# Altium PCB 20K Control Board V1.1.PcbDoc (part 7 of 24)
Units mm, origin at the board's own origin, x right, y up, seen from the top; angles counter-clockwise.
Board outline 132 x 260 mm, 4 copper layers (Top Layer, GND, VCC, Bottom Layer); 1384 components, 779 nets, 4515 pads, 1774 vias.
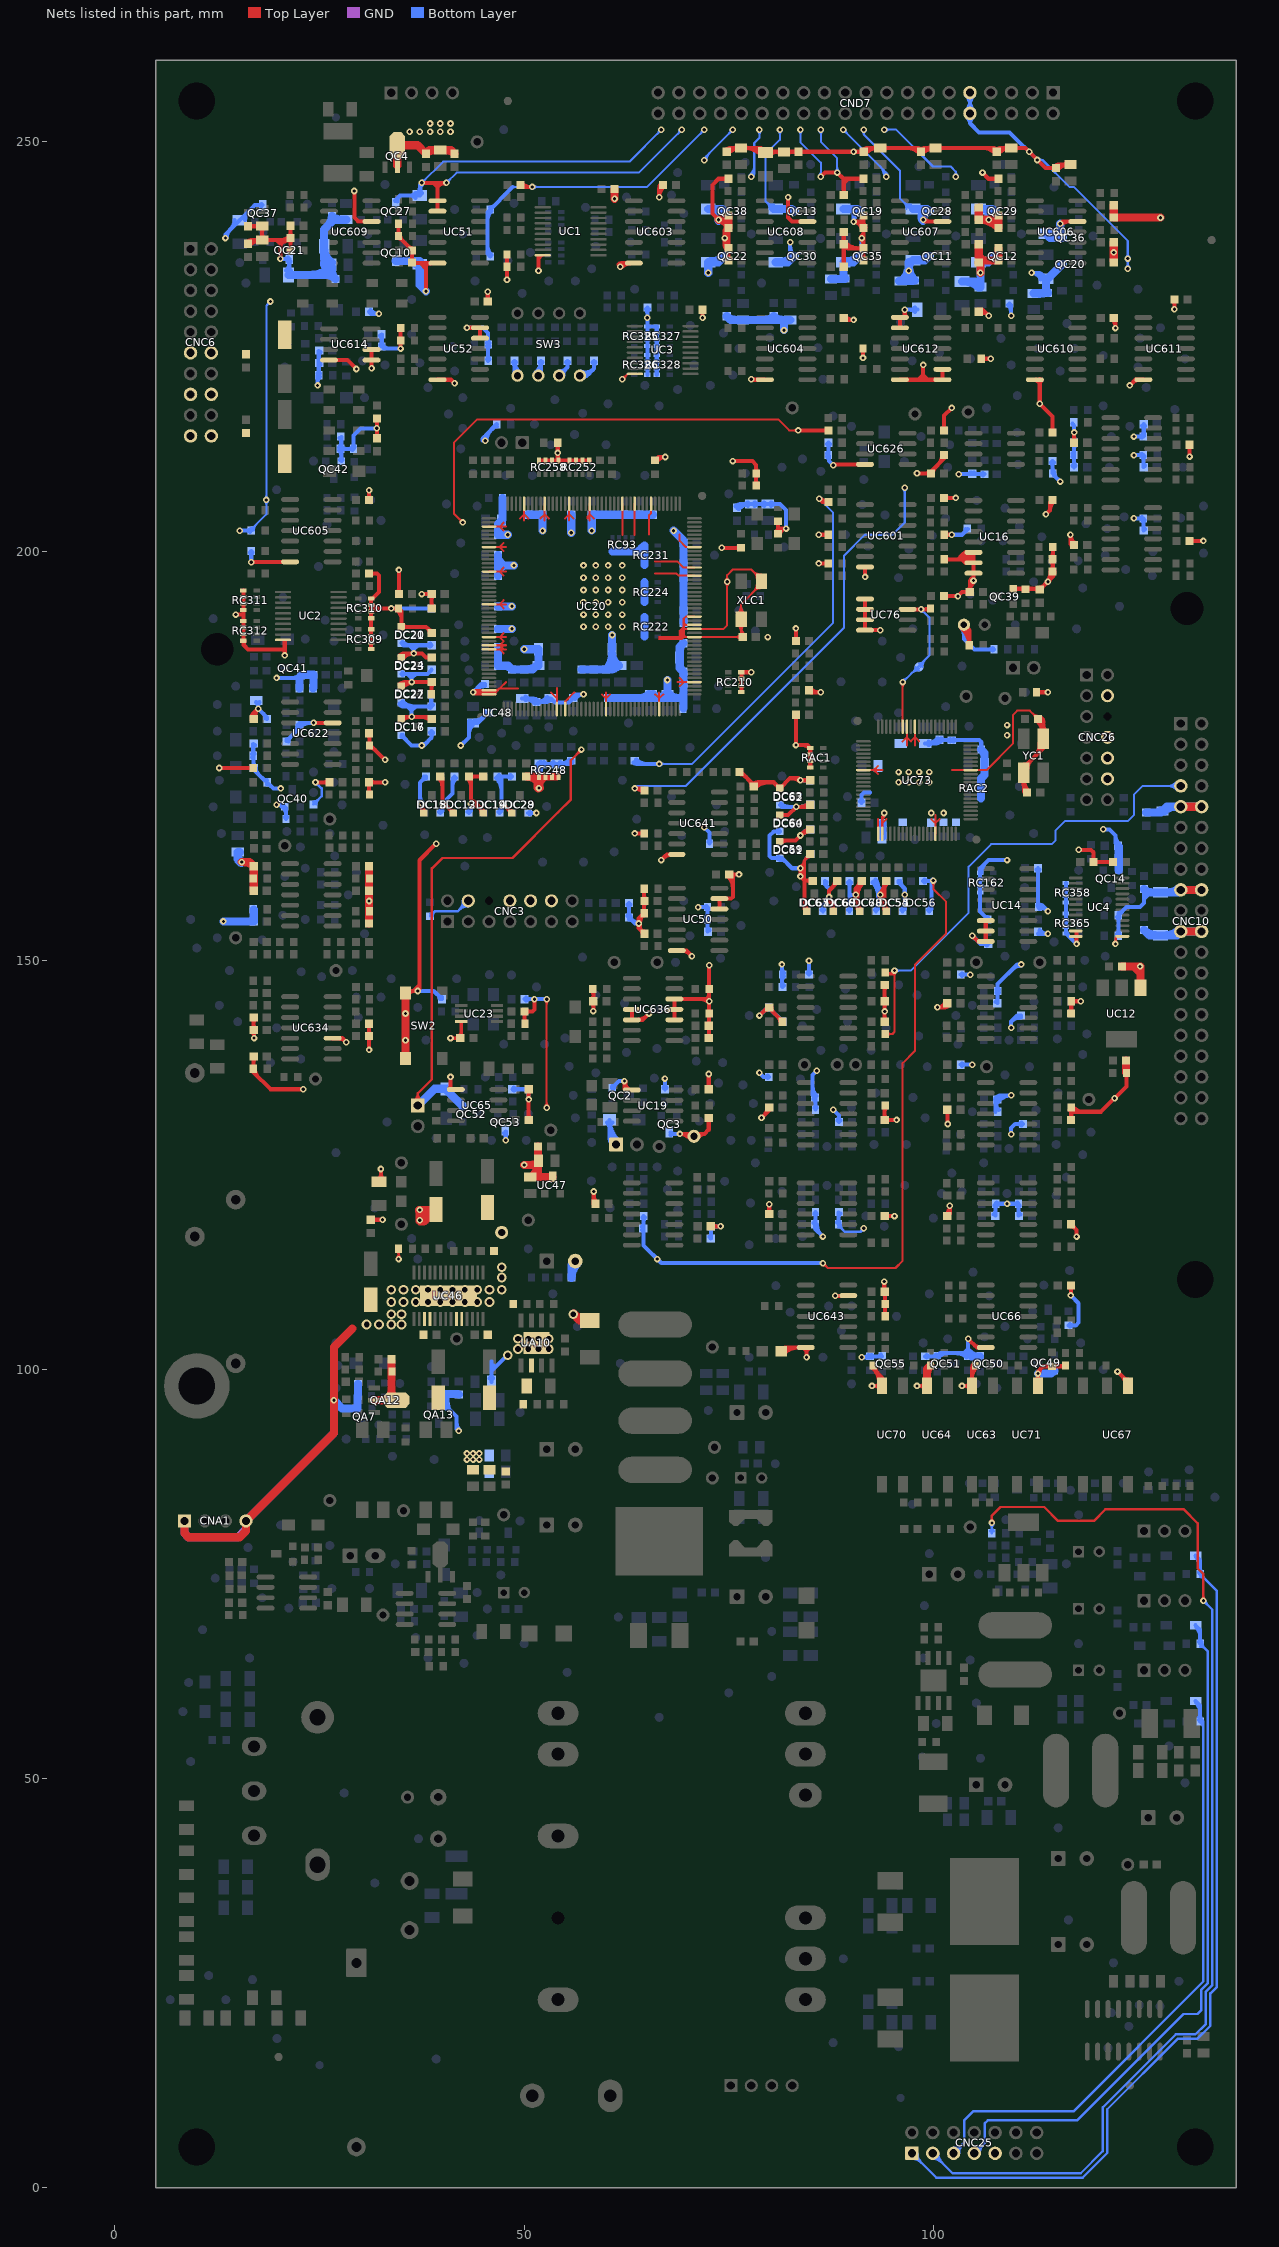
[diagram p9: the nets of this part, all layers, seen from the top]

## Via types
v1: diameter 0.8, hole 0.4, Top Layer to Bottom Layer, tented both sides, 1354 vias
v2: diameter 1.2, hole 0.7, Top Layer to Bottom Layer, 261 vias
v3: diameter 0.8, hole 0.4, Top Layer to Bottom Layer, 58 vias
v4: diameter 1.2, hole 0.7, Top Layer to Bottom Layer, tented top, 58 vias
v5: diameter 0.8, hole 0.4, Top Layer to Bottom Layer, tented top, 22 vias
v6: diameter 1.2, hole 0.7, Top Layer to Bottom Layer, tented both sides, 13 vias
v7: diameter 1.2, hole 0.7, Top Layer to Bottom Layer, tented bottom, 8 vias

## Nets (pads, with @x,y where several pads share a name; then routed paths per layer and width w, separated by ;. In a path a pad name is that pad's centre, name@x,y a point inside that pad or via, vN(x,y) a via of type N, cw(c..) or ccw(c..) an arc to the next point about the centre after c; other vN are vias at no path point) (continued)
EPROM2: pad.ICT@98.25,185.85 RC698.1 UC73.74 UC76.7 | length 26.9
  Top Layer w0.25: v1@96.056,183.806 cw(c95.586,183.336) 96.25,183.336 cw(c96.914,183.336) v1@96.444,183.806 ; UC73.74@96.25,178.55 v1(96.25,184)
  Top Layer w0.5: UC76.7@96.85,192.885 v1(98.5,192.885) RC698.1@99.535,192.885 ; 99.01,192.885 ccw(c99.01,193.59) RC698.1@99.509,193.091
  Bottom Layer w0.25: v1(96.25,184) 99.5,187.25 99.5,191.885 v1(98.5,192.885) ; v1@96.25,184.275 ccw(c96.25,184.939) 96.719,184.469 ccw(c97.189,184) v1@96.525,184 ; 97.268,185.018 cw(c98.25,184.037) pad.ICT@98.25,185.425 ; 97.631,185.381 ccw(c97.161,185.85) pad.ICT@97.825,185.85 ; 97.695,185.445 cw(c98.25,184.89) pad.ICT@98.25,185.675 ; pad.ICT@98.25,186.275 ccw(c98.25,186.939) 98.719,186.469 ; pad.ICT@98.425,185.85 cw(c99.21,185.85) 98.655,186.405 ; v1@98.5,192.61 cw(c98.5,191.946) 98.969,192.416 cw(c99.439,192.885) v1@98.775,192.885 ; pad.ICT@98.675,185.85 cw(c100.063,185.85) 99.082,186.832
FAN5V.STATE1: CNC25.5 DC7.1 RC81.2 | length 85.5
  Bottom Layer w0.3: CNC25.5@102.46,4.23 103.75,5.52 103.75,8.25 104.85,9.35 117.1,9.35 133,25.25 133,56.974 132.812,57.162 cw(c132.359,56.709) RC81.2@133,56.709 ; CNC25.5@102.46,4.605 ccw(c102.46,5.51) 103.1,4.87 ccw(c103.74,4.23) CNC25.5@102.835,4.23 ; CNC25.5@102.46,4.905 ccw(c102.46,6.535) 103.612,5.382 ccw(c104.765,4.23) CNC25.5@103.135,4.23 ; RC81.2@132.388,57.488 cw(c130.91,56.01) 133,56.01 ; RC81.2@132.6,56.95 cw(c131.634,55.984) 133,55.984 ; RC81.2@132.6,57 RC81.2@133,56.6
  Bottom Layer w0.5: DC7.1@132.05,59.5 132.6,58.95 RC81.2@132.6,57 ; DC7.1@132.073,59.323 cw(c130.801,58.051) 132.6,58.051 ; RC81.2@132.459,57.191 ccw(c132.117,57.533) 132.6,57.533 ccw(c133.083,57.533) RC81.2@132.741,57.191
FAN5V.STATE2: CNC25.7 DC8.1 RC82.2 | length 91.6
  Bottom Layer w0.3: CNC25.7@105,4.23 106.25,5.48 106.25,7.85 106.65,8.25 117.556,8.25 130.556,21.25 132.25,21.25 132.75,21.75 132.75,24.222 133.55,25.022 133.55,65.55 RC82.2@132.6,66.5 ; CNC25.7@105,4.605 ccw(c105,5.51) 105.64,4.87 ccw(c106.28,4.23) CNC25.7@105.375,4.23 ; CNC25.7@105,4.905 ccw(c105,6.535) 106.152,5.382 ccw(c107.305,4.23) CNC25.7@105.675,4.23 ; RC82.2@132.6,66.15 cw(c132.6,65.305) 133.197,65.903 ; RC82.2@132.9,66.45 ccw(c133.504,66.45) 133.077,66.023
  Bottom Layer w0.5: DC8.1@132.05,68.75 132.6,68.2 RC82.2@132.6,66.5 ; DC8.1@132.073,68.573 cw(c130.801,67.301) 132.6,67.301 ; RC82.2@132.459,66.691 ccw(c132.117,67.033) 132.6,67.033 ccw(c133.083,67.033) RC82.2@132.741,66.691
FAN5V.STATE3: CNC25.1 DC30.1 RC85.2 | length 114.7
  Bottom Layer w0.3: CNC25.1@97.38,3.555 cw(c97.38,1.925) 98.532,3.078 cw(c99.685,4.23) CNC25.1@98.055,4.23 ; CNC25.1@97.38,3.855 cw(c97.38,2.95) 98.02,3.59 cw(c98.66,4.23) CNC25.1@97.755,4.23 ; CNC25.1@97.38,4.23 100.36,1.25 118.228,1.25 121.25,4.272 121.25,7.25 121.25,7.75 ; 121.25,7.805 121.25,7.75 ; RC85.2@132.6,74.65 cw(c132.6,73.805) 133.197,74.403 ; RC85.2@132.6,75 134.65,72.95 134.65,24.567 133.85,23.767 133.85,19.822 132.228,18.2 129.839,18.2 121.25,9.611 121.25,7.75 ; RC85.2@132.9,74.95 ccw(c133.504,74.95) 133.077,74.523
  Bottom Layer w0.5: DC30.1@132.05,77.25 132.6,76.7 RC85.2@132.6,75 ; DC30.1@132.073,77.073 cw(c130.801,75.801) 132.6,75.801 ; RC85.2@132.459,75.191 ccw(c132.117,75.533) 132.6,75.533 ccw(c133.083,75.533) RC85.2@132.741,75.191
FAN.CONTROL: CNC25.3 RC78.2 | length 145.9
  Top Layer w0.3: v1@106.973,81.427 ccw(c106.546,81.854) 107.15,81.854 ccw(c107.754,81.854) v1@107.327,81.427 ; v1(107.15,81.25) 107.15,82.15 108.2,83.2 113.55,83.2 115.25,81.5 119.607,81.5 121.007,82.9 130.6,82.9 132.3,81.2 132.3,75.7 133,75 v1(133,71.75) ; v1@132.823,71.927 ccw(c132.396,72.354) 133,72.354 ccw(c133.604,72.354) v1@133.177,71.927
  Bottom Layer w0.3: CNC25.3@99.92,3.555 cw(c99.92,1.925) 101.072,3.078 cw(c102.225,4.23) CNC25.3@100.595,4.23 ; CNC25.3@99.92,3.855 cw(c99.92,2.95) 100.56,3.59 cw(c101.2,4.23) CNC25.3@100.295,4.23 ; CNC25.3@99.92,4.23 102.35,1.8 118,1.8 120.7,4.5 120.7,9.839 129.611,18.75 132,18.75 133.3,20.05 133.3,23.994 134.1,24.794 134.1,70.65 v1(133,71.75) ; RC78.2@106.938,80.262 ccw(c106.426,80.774) 107.15,80.774 ccw(c107.874,80.774) RC78.2@107.362,80.262 ; v1@106.973,81.073 cw(c106.546,80.646) 107.15,80.646 cw(c107.754,80.646) v1@107.327,81.073 ; RC78.2@107.15,80 v1(107.15,81.25) ; v1@133,71.5 cw(c133,70.896) 133.427,71.323 cw(c133.854,71.75) v1@133.25,71.75
FAN.PWM: CNC25.9
GFCI: CNC10.7 RC163.1 RC174.1 | length 73.6
  Top Layer w0.25: RC163.1@94.1,141 95,141 95.25,141.25 95.25,148.25 ; RC174.1@94.1,148.5 RC174.1@94.35,148.25 ; RC174.1@94.157,148.499 ccw(c94.702,148.972) 94.702,148.25 ; RC163.1@94.33,140.77 cw(c94.885,140.215) 94.885,141 cw(c94.885,141.785) RC163.1@94.33,141.23 ; RC174.1@94.346,148.663 ccw(c95.25,149.447) 95.25,148.25 ; 94.64,148.25 ccw(c94.64,148.841) v1@95.225,148.754 ; 94.931,148.25 ccw(c94.931,148.798) v1@95.473,148.717 ; v1@94.978,148.791 cw(c94.35,148.885) RC174.1@94.35,148.25 ; v1@95.056,148.556 cw(c94.586,148.086) 95.25,148.086 cw(c95.914,148.086) v1@95.444,148.556 ; v1(95.25,148.75) 95.25,148.25 ; RC174.1@94.35,148.25 95.25,148.25 ; v1@95.103,148.518 cw(c94.933,148.25) 95.25,148.25 ; v1@95.103,148.518 cw(c94.933,148.25) 95.25,148.25 ; v1@95.103,148.518 cw(c94.933,148.25) 95.25,148.25 ; 95.25,148.25 cw(c95.567,148.25) v1@95.397,148.518 ; 95.25,148.25 cw(c95.567,148.25) v1@95.397,148.518 ; 95.25,148.25 cw(c95.567,148.25) v1@95.397,148.518
  Bottom Layer w0.25: v1(95.25,148.75) 97.25,148.75 104.3,155.8 104.3,161.436 107.064,164.2 114.45,164.2 114.945,164.695 114.945,165.882 116.063,167 123.75,167 124.5,167.75 124.5,170.25 125.56,171.31 CNC10.7@130.23,171.31 ; v1@95.444,148.556 cw(c95.914,148.086) 95.914,148.75 cw(c95.914,149.414) v1@95.444,148.944 ; CNC10.7@129.735,170.815 ccw(c128.54,169.62) 128.54,171.31 ccw(c128.54,173) CNC10.7@129.735,171.805 ; CNC10.7@129.912,170.992 ccw(c129.144,170.224) 129.144,171.31 ccw(c129.144,172.396) CNC10.7@129.912,171.628
GND: CA5.2 CA74.1 CA77.1 CA78.2 CA112.1 CA115.1 CA121.1 CA122.1 CC1.1 CC2.1 CC7.1 CC8.2 CC9.2 CC12.2 CC15.2 CC16.2 CC17.2 CC18.2 CC19.1 CC20.2 CC21.2 CC23.2 CC30.1 CC31.2 CC34.2 CC35.2 CC38.1 CC40.2 CC42.2 CC45.1 CC46.2 CC47.1 CC48.2 CC49.1 CC54.2 CC55.1 CC57.1 CC58.1 CC59.1 CC62.2 CC63.2 CC64.1 CC65.1 CC67.1 CC68.2 CC70.2 CC71.2 CC72.1 CC73.1 CC76.2 CC77.2 CC78.1 CC79.2 CC80.2 CC82.2 CC84.1 CC85.1 CC86.1 CC87.2 CC88.2 CC90.1 CC92.1 CC93.1 CC94.1 CC95.1 CC96.1 CC98.1 CC99.1 CC100.1 CC101.1 CC103.2 CC105.2 CC106.2 CC107.2 CC108.1 CC109.1 CC110.2 CC111.2 CC112.2 CC113.2 CC114.2 CC115.2 CC116.2 CC117.2 CC118.2 CC119.2 CC120.2 CC121.2 CC122.2 CC123.2 CC124.2 CC125.2 CC126.2 CC127.2 CC128.2 CC129.2 CC130.2 CC131.2 CC132.1 CC133.1 CC134.1 CC135.1 CC136.1 CC137.1 CC138.1 CC139.1 CC140.1 CC141.1 CC142.1 CC143.1 CC144.1 CC145.1 CC146.2 CC147.1 CC148.1 CC149.1 CC150.1 CC151.1 CC152.1 CC153.1 CC154.1 CC155.1 CC156.1 CC157.1 CC158.1 CC159.1 CC160.1 CC161.1 CC162.1 CC163.1 CC164.2 CC165.1 CC166.2 CC167.1 CC168.1 CC169.1 CC170.1 CC171.1 CC172.1 CC173.1 CC174.1 CC175.1 CC176.1 CC177.2 CC178.2 CC179.2 CC180.2 CC181.2 CC182.2 CC183.2 CC184.2 CC185.2 CC186.2 CC187.2 CC191.2 CC192.2 CC193.2 CC196.2 CC198.1 CC200.1 CC201.2 CC202.1 CC203.2 CC204.2 CC205.2 CC206.2 CC207.2 CC208.2 CC209.2 CC210.1 CC211.1 CC212.1 CC213.2 CC214.1 CC215.2 CC216.1 CC217.1 CC218.1 CC219.2 CC220.1 CC221.2 CC222.1 CC223.2 CC224.2 CC225.2 CC226.2 CC227.2 CC228.1 CC229.1 CC230.1 CC231.2 CC232.2 CC233.2 CC234.2 CC235.2 CC236.2 CC237.1 CC238.1 CC239.1 CC240.2 CC241.2 CC242.2 CC243.2 CC244.2 CC245.2 CC246.2 CC247.2 CC248.1 CC249.1 CC250.1 CC252.1 CC255.2 CC265.1 CC266.1 CC267.2 CC268.2 CC269.2 CC270.1 CC271.2 CC272.1 CC273.2 CC274.2 CC275.2 CC276.2 CC277.2 CC278.2 CC280.2 CC281.2 CC282.1 CC283.1 CC284.2 CC286.1 CC287.2 CC288.2 CC289.2 CC291.2 CC292.1 CC293.2 CC294.2 CC295.2 CC296.2 CC297.1 CC298.2 CC299.2 CC300.2 CC301.2 CC302.2 CC303.1 CC304.2 CC305.1 CC306.1 CC307.1 CC308.1 CC309.1 CC317.2 CC318.1 CC319.2 CC320.1 CC321.2 CC322.1 CC323.2 CC326.1 CC327.2 CC328.2 CC329.2 CC330.2 CC331.2 CC332.2 CC333.2 CC334.2 CC335.2 CC336.2 CC337.2 CC338.2 CC339.2 CC340.2 CC341.2 CC342.2 CC343.2 CC344.2 CC345.2 CC346.1 CC347.1 CC348.1 CC349.1 CC350.2 CC351.2 CC352.2 CC354.2 CC355.2 CC356.1 CC393.2 CC394.1 CC395.1 CC397.2 CC398.2 CC399.1 CC401.2 CC403.1 CC404.1 CC405.2 CC406.1 CC407.1 CC408.1 CC409.2 CC416.1 CC417.1 CC418.1 CC420.2 CC421.1 CC422.1 CC423.1 CC424.1 CC425.2 CC426.2 CC427.2 CC428.1 CC429.1 CC430.1 CC431.2 CC434.1 CC436.1 CC437.2 CC439.2 CC440.1 CC442.2 CC445.1 CC447.2 CC449.2 CNA1.1 CNA1.4 CNC1.1 CNC3.4 CNC3.8 CNC3.10 CNC3.12 CNC6.11 CNC6.12 CNC6.15 CNC6.16 CNC6.19 CNC6.20 CNC10.9 CNC10.10 CNC10.17 CNC10.18 CNC10.21 CNC10.22 CNC26.4 CNC26.8 CNC26.10 CNC26.12 CND7.9 CND7.10 DA7.1 DC11.1 DC12.1 DC13.1 DC14.1 DC15.1 DC16.1 DC17.1 DC18.1 DC19.1 DC20.1 DC21.1 DC22.1 DC23.1 DC24.1 DC27.1 DC28.1 DC29.1 DC54.1 DC55.1 DC56.1 DC58.1 DC59.1 DC60.1 DC61.1 DC62.1 DC63.1 DC64.1 DC65.1 DC66.1 DC67.1 DC68.1 DC69.1 DC70.1 EC1.2 EC2.2 EC3.2 EC4.2 EC5.2 EC6.1 EC8.2 JC1.1 LA5.2 LA8.2 LA9.2 LA17.2 LEDA1.2 NTCC1.2 QA7.1 QA12.2 QA13.1 QC2.2 QC3.3 QC4.2 QC10.3 QC11.3 QC12.3 QC13.3 QC14.2 QC19.3 QC20.3 QC21.3 QC22.3 QC27.3 QC28.3 QC29.3 QC30.3 QC35.3 QC36.3 QC37.3 QC38.3 QC39.2 QC40.1 QC41.1 QC42.2 QC49.2 QC50.2 QC51.2 QC52.2 QC53.3 QC55.2 RA116.2 RA117.1 RA163.1 RA184.1 RA188.1 RAC1.5 RAC1.6 RAC1.7 RAC1.8 RAC2.5 RAC2.6 RAC2.7 RAC2.8 RC1.1 RC5.2 RC9.1 RC13.1 RC26.2 RC27.2 RC28.2 RC30.2 RC31.2 RC36.2 RC38.1 RC40.2 RC41.1 RC43.1 RC54.2 RC66.2 RC74.2 RC83.1 RC90.2 RC92.2 RC93.5 RC93.6 RC93.7 RC93.8 RC95.2 RC101.2 RC103.2 RC108.1 RC113.2 RC124.2 RC133.1 RC142.2 RC144.2 RC148.1 RC150.1 RC153.1 RC154.1 RC157.2 RC158.1 RC161.2 RC162.1 RC162.2 RC162.3 RC162.4 RC165.1 RC170.1 RC173.2 RC179.1 RC188.1 RC193.2 RC194.2 RC198.1 RC207.1 RC210.5 RC210.6 RC210.7 RC210.8 RC217.1 RC222.5 RC222.6 RC222.7 RC222.8 RC224.5 RC224.6 RC224.7 RC224.8 RC225.1 RC227.2 RC231.5 RC231.6 RC231.7 RC231.8 RC234.1 RC235.1 RC236.2 RC237.2 RC239.1 RC244.1 RC247.1 RC248.1 RC248.2 RC248.3 RC248.4 RC250.1 RC252.5 RC252.6 RC252.7 RC252.8 RC253.1 RC258.5 RC258.6 RC258.7 RC258.8 RC259.1 RC262.2 RC283.1 RC288.1 RC309.5 RC309.6 RC309.7 RC309.8 RC310.5 RC310.6 RC310.7 RC310.8 RC311.5 RC311.6 RC311.7 RC311.8 RC312.5 RC312.6 RC312.7 RC312.8 RC325.5 RC325.6 RC325.7 RC325.8 RC326.5 RC326.6 RC326.7 RC326.8 RC327.5 RC327.6 RC327.7 RC327.8 RC328.5 RC328.6 RC328.7 RC328.8 RC330.1 RC345.2 RC354.1 RC355.1 RC356.1 RC357.1 RC358.1 RC358.2 RC358.3 RC358.4 RC365.1 RC365.2 RC365.3 RC365.4 RC366.1 RC367.1 RC368.1 RC369.1 RC370.1 RC376.1 RC377.1 RC378.1 RC379.1 RC387.1 RC388.1 RC389.1 RC390.1 RC444.1 RC446.1 RC454.2 RC463.1 RC464.1 RC465.2 RC466.1 RC467.1 RC469.2 RC472.2 RC481.2 RC485.1 RC489.1 RC491.2 RC492.1 RC498.1 RC499.2 RC501.1 RC503.1 RC510.1 RC512.1 RC513.2 RC514.2 RC515.2 RC516.1 RC517.1 RC526.1 RC527.1 RC528.1 RC529.1 RC530.1 RC531.1 RC533.1 RC534.1 RC535.1 RC601.1 RC603.1 RC605.2 RC609.1 RC612.1 RC613.1 RC629.1 RC634.2 RC639.2 RC640.1 RC652.1 RC653.2 RC662.1 RC671.1 RC673.1 RC675.2 RC679.1 RC684.1 RC686.1 RC693.2 RC706.2 SW2.1 SW2.2 SW3.1 SW3.2 SW3.3 SW3.4 TP30.1 TP61.1 UA10.6 UA10.9 UC1.10 UC2.10 UC3.10 UC4.11 UC4.12 UC4.13 UC12.1 UC14.6 UC14.7 UC14.8 UC16.6 UC16.7 UC16.8 UC19.1 UC20.3 UC20.8 UC20.14 UC20.22 UC20.30 UC20.32 UC20.33 UC20.43 UC20.44 UC20.58 UC20.60 UC20.70 UC20.83 UC20.92 UC20.103 UC20.105 UC20.106 UC20.108 UC20.118 UC20.120 UC20.125 UC20.140 UC20.144 UC20.147 UC20.155 UC20.160 UC20.166 UC20.171 UC23.4 UC46.3 UC46.4 UC46.9 UC46.10 UC46.29 UC47.3 UC48.3 UC50.7 UC50.12 UC50.13 UC51.1 UC51.2 UC51.7 UC52.7 UC52.12 UC52.13 UC63.2 UC64.2 UC65.1 UC66.7 UC67.3 UC70.2 UC71.3 UC73.8 UC73.21 UC73.22 UC73.35 UC73.53 UC73.71 UC73.73 UC76.1 UC76.2 UC76.3 UC76.4 UC601.7 UC603.7 UC604.7 UC605.7 UC606.12 UC607.12 UC608.12 UC609.12 UC610.7 UC611.7 UC612.1 UC612.2 UC612.7 UC612.8 UC612.9 UC614.4 UC614.5 UC614.6 UC622.12 UC626.4 UC634.10 UC636.4 UC636.5 UC636.10 UC636.11 UC636.12 UC641.7 UC643.7 UC643.13 XLC1.2 XLC1.4 YC1.2 YC1.4 | length 3104.1
  Top Layer w0.25: v1@42.225,203.5 ccw(c41.561,203.5) 42.031,203.969 ccw(c42.5,204.439) v1@42.5,203.775 ; v1(42.5,203.5) 41.4,204.6 41.4,213.238 44.262,216.1 81.036,216.1 82.386,214.75 v1(83.5,214.75) ; v1@43.768,182.732 cw(c44.414,182.086) 44.414,183 ; v1@43.768,182.768 ccw(c44.414,183.414) 44.414,182.5 ; v1@43.944,182.556 cw(c45.017,181.483) UC20.43@45.017,183 ; v1@43.944,182.944 ccw(c45.017,184.017) UC20.44@45.017,182.5 ; UC20.33@45.7,188 47,188 ; UC20.32@45.7,188.5 47,188.5 ; UC20.30@45.7,189.5 47,189.5 ; UC20.22@45.7,193.5 47,193.5 ; UC20.14@45.7,197.5 47,197.5 ; UC20.8@45.7,200.5 47,200.5 ; UC20.3@45.7,203 47,203 ; UC20.43@46.432,182.982 cw(c46.235,182.785) 46.514,182.785 ; UC20.43@46.45,183.025 ccw(c46.45,183.879) 47.054,183.275 ; UC20.44@46.475,182.5 cw(c46.949,182.5) 46.614,182.835 ; 46.5,182.75 v1(43.75,182.75) ; UC20.43@46.514,182.986 46.514,182.735 ; 46.779,183 UC20.43@45.7,183 44,183 v1(43.75,182.75) ; 47.5,187.5 47,188 ; 47.5,188 47,188.5 ; 47.5,188.5 47,188 ; 47.5,190 47,189.5 ; 47.5,193 47,193.5 ; 47.5,194 47,193.5 ; 47.5,197 47,197.5 ; 47.5,198 47,197.5 ; 47.5,200 47,200.5 ; 47.5,201 47,200.5 ; 47.5,202.5 47,203 ; 47.5,203.5 47,203 ; 47.75,188 47,188 ; 47.75,188.5 47,188.5 ; 47.75,189.5 47,189.5 ; 47.75,193.5 47,193.5 ; 47.75,197.5 47,197.5 ; 47.75,200.5 47,200.5 ; 47.75,203 47,203 ; 47.779,184 47.014,183.235 ; 49.235,183.235 47.014,183.235 ; 49.5,204 50,204.5 ; 50,203.75 50,204.5 ; UC20.171@50,205.8 50,204.5 ; 50.5,204 50,204.5 ; 51.75,235.625 UC1.10@52.279,236.154 ; 52,204 52.5,204.5 ; 52.5,203.75 52.5,204.5 ; UC20.166@52.5,205.8 52.5,204.5 ; v1@52.556,132.194 ccw(c52.086,132.664) 52.75,132.664 ccw(c53.414,132.664) v1@52.944,132.194 ; v1@52.556,145.056 cw(c52.086,144.586) 52.75,144.586 cw(c53.414,144.586) v1@52.944,145.056 ; v1(52.75,132) v1(52.75,145.25) ; 53,204 52.5,204.5 ; 53.25,182.75 54,182 ; UC20.58@54,180.7 54,182 ; 54,183.25 54,182 ; UC20.60@55,180.7 55,181.625 56.125,182.75 ; 55,204 55.5,204.5 ; UC20.60@55.025,181.45 cw(c55.507,181.45) 55.166,181.791 ; 55.5,203.75 55.5,204.5 ; UC20.160@55.5,205.8 55.5,204.5 ; 56,204 55.5,204.5 ; 57.75,204 57.75,204.25 58,204.5 ; 58,203.75 58,204.5 ; UC20.155@58,205.8 58,204.5 ; 58.5,204 58,204.5 ; 59.5,182.5 60,182 ; UC20.70@60,180.7 60,182 ; 60,182.75 60,182 ; 60.5,182.5 60,182 ; 62,202 UC20.147@62,205.8 ; v1(62,221) 62.654,221.654 UC3.10@63.529,221.654 ; v1@62,221.275 ccw(c62,221.939) 62.469,221.469 ccw(c62.939,221) v1@62.275,221 ; 63.5,202 UC20.144@63.5,205.8 ; 65.275,202.047 65.275,204.388 65.5,204.613 UC20.140@65.5,205.8 ; 66,182.5 66.5,182 ; 66,197.25 68.614,197.25 68.864,197 UC20.118@70.8,197 ; 66,198.75 68.704,198.75 69.454,198 UC20.120@70.8,198 ; UC20.83@66.5,180.7 66.5,182 ; 66.5,182.75 66.5,182 ; 66.5,189.25 69.25,189.25 69.5,189.5 ; 66.5,189.5 69,189.5 ; 67,182.5 66.5,182 ; 68.75,184 69.5,184 ; 69,183.5 69.5,184 ; 69,184.5 69.5,184 ; 69,189.75 69.5,190.25 ; 69,190 69.5,190.5 ; 69,190.25 69.5,190.75 ; 69,202 69,201.25 69.75,200.5 UC20.125@70.8,200.5 ; 69.444,189.944 69.5,190 ; 69.5,191.25 69.75,191 ; UC20.92@70.8,184 69.5,184 ; UC20.106@70.8,191 69.75,191 ; UC20.108@70.8,192 69.75,192 69.5,191.75 69.5,191 ; 73.3,190.5 73,190.5 ; v1@74.606,196.056 cw(c74.136,195.586) 74.8,195.586 cw(c75.464,195.586) v1@74.994,196.056 ; v1@74.606,196.444 ccw(c74.136,196.914) 74.8,196.914 ccw(c75.464,196.914) v1@74.994,196.444 ; XLC1.2@76.093,191.043 cw(c75.112,190.062) 76.5,190.062 cw(c77.888,190.062) XLC1.2@76.907,191.043 ; XLC1.2@76.093,192.357 ccw(c75.112,193.338) 76.5,193.338 ccw(c77.888,193.338) XLC1.2@76.907,192.357 ; XLC1.2@76.27,191.22 cw(c75.715,190.665) 76.5,190.665 cw(c77.285,190.665) XLC1.2@76.73,191.22 ; XLC1.2@76.27,192.18 ccw(c75.715,192.735) 76.5,192.735 ccw(c77.285,192.735) XLC1.2@76.73,192.18 ; CC162.1@76.435,189.235 ccw(c75.795,188.595) 75.795,189.5 ccw(c75.795,190.405) CC162.1@76.435,189.765 ; 76.5,190.285 ccw(c77.485,190.285) CC162.1@76.788,189.588 ; XLC1.2@76.5,190.888 ccw(c78.088,190.888) CC162.1@76.965,189.765 ; 77.933,197.567 ccw(c79,198.634) XLC1.4@79,197.125 ; 77.983,194.983 ccw(c76.916,196.05) XLC1.4@78.425,196.05 ; 78.054,197.446 cw(c77.158,196.55) XLC1.4@78.425,196.55 ; 78.104,195.104 cw(c79,194.208) XLC1.4@79,195.475 ; XLC1.4@78.36,197.14 ccw(c79,197.78) XLC1.4@79,196.875 ; XLC1.4@78.41,195.41 ccw(c77.77,196.05) XLC1.4@78.675,196.05 ; v1@83.306,214.556 ccw(c82.836,214.086) 82.836,214.75 ccw(c82.836,215.414) v1@83.306,214.944 ; v1@86.5,112.725 cw(c86.5,112.061) 86.969,112.531 cw(c87.439,113) v1@86.775,113 ; v1(86.5,113) 87.1,112.4 95.377,112.4 96.25,113.273 96.25,137.432 97.75,138.932 97.75,149.475 101.552,153.277 101.552,157.157 100,158.709 v1(100,159.75) ; UC73.8@91.45,173.25 92.75,173.25 ; UC73.21@93.25,165.45 93.25,167.25 ; 93.25,172.75 92.75,173.25 ; 93.25,173.75 92.75,173.25 ; UC73.22@93.75,165.45 93.75,166.75 ; 93.75,166.733 cw(c95.267,166.733) v1@94.194,167.806 ; 93.75,167.336 cw(c94.664,167.336) v1@94.018,167.982 ; 93.75,167.56 93.75,166.75 ; 93.75,173.25 92.75,173.25 ; 94.25,167.25 93.75,166.75 ; 96.25,176.75 96.75,177.25 ; 96.75,176.25 96.75,177.25 ; UC73.73@96.75,178.55 96.75,177.25 ; 97.75,176.25 97.75,177.25 ; UC73.71@97.75,178.55 97.75,177.25 ; 98.25,176.75 97.75,177.25 ; 99.75,167.25 100.25,166.75 ; v1@99.806,159.556 cw(c99.336,159.086) 100,159.086 cw(c100.664,159.086) v1@100.194,159.556 ; UC73.35@100.25,165.45 100.25,166.75 ; 100.25,167.75 100.25,166.75 ; 100.75,167.25 100.25,166.75 ; 102.25,173.25 UC73.53@104.55,173.25 106.5,173.25 109.75,176.5 109.75,180 110.25,180.5 111.8,180.5 CC404.1@112.8,179.5 ; CC404.1@112.425,179.5 ccw(c111.52,179.5) 112.16,180.14 ccw(c112.8,180.78) CC404.1@112.8,179.875 ; v1@122.056,152.194 ccw(c121.586,152.664) 122.25,152.664 ccw(c122.914,152.664) v1@122.444,152.194 ; v1(122.25,152) 122.25,152.75 122.425,152.925 UC4.13@123.1,152.925 ; v1@122.25,152.382 cw(c122.968,152.382) UC4.13@122.46,152.89 ; 122.25,152.678 cw(c122.449,152.678) UC4.13@122.43,152.875 ; v1(43.75,182.75) 44,182.5 UC20.44@45.7,182.5 46.279,182.5 46.514,182.735 ; 46.514,182.735 ccw(c46.657,182.593) 46.473,182.51 cw(c46.657,182.593) 46.514,182.735 ; 46.514,182.735 47.014,183.235 ; 47,188.5 47.5,189 47,189.5 ; 69,189.5 69.5,190 ; 69,189.5 69.25,189.5 ; 69.25,189.5 69.5,189.75 ; 69.25,189.5 69.5,189.5 ; 69.5,189.5 69.75,189.5 ; 69.5,189.75 69.5,190 ; 69.5,189.75 69.75,189.5 ; 69.5,190 69.5,190.25 ; 69.5,190.25 69.5,190.5 ; 69.5,190.5 69.5,190.75 ; 69.5,190.5 UC20.105@70.8,190.5 73,190.5 ; 69.5,190.75 69.5,191 ; 69.5,191 69.75,191 ; 69.75,189.5 UC20.103@70.8,189.5 CC162.1@76.7,189.5 76.5,189.7 XLC1.2@76.5,191.7 76.5,193.5 79,196 XLC1.4@79,196.3 79,196.5 77.75,197.75 75.5,197.75 74.8,197.05 74.8,190.936 74.364,190.5 73,190.5 ; 96.75,177.25 97.25,176.75 97.75,177.25 ; UC20.44@46.432,182.518 ccw(c46.235,182.715) 46.514,182.715 cw(c46.235,182.715) UC20.44@46.432,182.518
  Top Layer w0.3: RC503.1@34.438,114.488 cw(c33.926,113.976) 34.65,113.976 cw(c35.374,113.976) RC503.1@34.862,114.488 ; v1@34.473,113.677 ccw(c34.046,114.104) 34.65,114.104 ccw(c35.254,114.104) v1@34.827,113.677 ; v1(34.65,113.5) RC503.1@34.65,114.5 ; JC1.1@36.556,132.811 ccw(c35.786,133.75) 37,133.75 ; JC1.1@37,132.27 37,133.75 ; JC1.1@37.444,132.811 cw(c38.214,133.75) 37,133.75 ; v1@56.75,175.75 cw(c56.146,175.75) 56.573,175.323 cw(c57,174.896) v1@57,175.5 ; v1(57,175.75) 55.7,174.45 55.7,169.642 54.154,168.096 48.558,162.5 40,162.5 38.725,161.225 38.725,135.475 37,133.75
  Top Layer w0.4: CC152.1@38.7,190 CC152.1@38.7,190.05 ; v1(41,140.5) CC163.1@42.2,140.5 ; v1@41.141,140.359 cw(c41.483,140.017) 41.483,140.5 cw(c41.483,140.983) v1@41.141,140.641 ; CC163.1@41.988,140.288 ccw(c41.476,139.776) 41.476,140.5 ccw(c41.476,141.224) 41.988,140.712 ccw(c41.18,141.52) 42.323,141.52 ; CC163.1@42.323,140.623 UC23.4@42.323,142.525 ; v1@83.609,160.391 ccw(c82.06,161.94) 84.25,161.94 ; v1@83.616,161.102 cw(c82.314,159.669) 84.25,159.669 ; v1@83.682,161.438 ccw(c83.386,162.25) 84.25,162.25 ; v1(83.75,161.25) 84.25,161.75 84.25,162.25 ; v1@83.75,161.45 ccw(c83.75,161.933) 84.091,161.591 ccw(c84.433,161.25) v1@83.95,161.25 ; v1@83.752,160.45 cw(c83.747,159.947) 84.25,159.947 ; v1@83.818,161.062 ccw(c83.594,161.679) 84.25,161.679 ; v1@83.884,161.398 cw(c83.135,160.572) 84.25,160.572 ; v1@83.891,160.109 ccw(c83.026,160.974) 84.25,160.974 ; 84.25,159.75 84.25,162.25 ; 84.403,162.403 ccw(c83.805,163) CC407.1@84.65,163 ; CC407.1@84.523,162.523 cw(c84.95,162.096) CC407.1@84.95,162.7 ; CC407.1@84.95,163 84.95,162.95 84.25,162.25